# EAGLE board Haar_Primal (EAGLE 9.6.2)
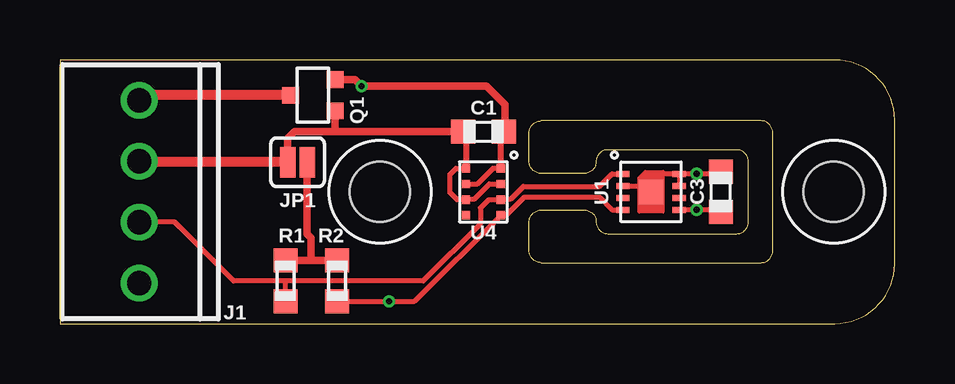
[diagram p0: board, top side]
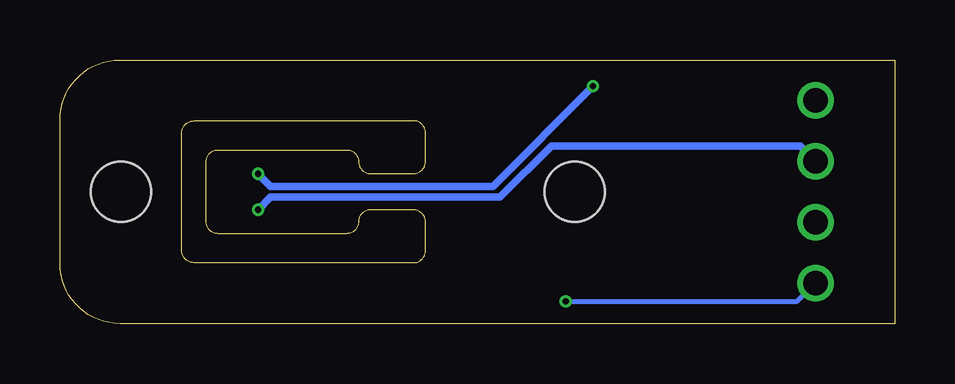
[diagram p1: board, bottom side, seen from below]

Size 34.8 x 11 mm. Coordinates in mm from the lower left corner, seen from the top.
Outline: 0,0 32.3,0 arc90 34.8,2.5 34.8,8.5 arc90 32.3,11 0,11 0,0
Outline: 19.56,6.76 19.56,7.96 arc-90 20.06,8.46 29.22,8.46 arc-90 29.72,7.96 29.72,3.04 arc-90 29.22,2.54 20.06,2.54 arc-90 19.56,3.04 19.56,4.24 arc-90 20.06,4.74 21.86,4.74 arc-90 22.35,4.25 arc90 22.85,3.75 28.2,3.75 arc90 28.7,4.25 28.7,6.75 arc90 28.2,7.25 22.84,7.25 arc90 22.35,6.76 arc-90 21.85,6.26 20.06,6.26 arc-90 19.56,6.76
Copper layers (1*16): Top 0.035559375mm / dielectric 1.6mm / Bottom 0.035559375mm
Design rules "oshpark-2layer": minimum track width 6mil, minimum drill 10mil, track to track 6mil, track to pad 6mil, pad to pad 6mil, via to via 6mil, smd to smd 6mil, copper to edge 15mil, drill to drill 6mil, minimum pad ring 5mil, minimum via ring 5mil, stop-mask expansion 2.5mil, vias tented up to drill 0mil, thermal gap 10mil

## Footprints (pad centres in the part's own frame; a part is rotated, then mirrored left to right if it is on the bottom)
C0603 = smd 1 x 1: 1 -0.85,0; 2 0.85,0
2_56 = hole 2.5: 0,0
1X04_SCREW = drill 1.016: 1 -3.81,0; 2 -1.27,0; 3 1.27,0; 4 3.81,0
SMT-JUMPER_2_NC_PASTE_SILK = smd 0.635 x 1.27: 1 -0.406,0; 2 0.406,0
SOT323 = smd 0.7 x 0.7: 1 -0.65,-0.925; 2 0.65,-0.925; 3 0,0.925
R0603 = smd 1 x 1: 1 -0.85,0; 2 0.85,0
DFN_8_2.5X2.5 = smd 0.55 x 0.25: 1 -1.175,0.75; 2 -1.175,0.25; 3 -1.175,-0.25; 4 -1.175,-0.75; 5 1.175,-0.75; 6 1.175,-0.25; 7 1.175,0.25; 8 1.175,0.75 | smd 1 x 1: EP 0,0
PG-VLGA-8 = smd 0.35 x 0.35: 1 0.725,0.975; 2 0.725,0.325; 3 0.725,-0.325; 4 0.725,-0.975; 5 -0.725,-0.975; 6 -0.725,-0.325; 7 -0.725,0.325; 8 -0.725,0.975

## Placement (x,y rotation side)
C1  0.1uF  [C0603]  17.65,8 0 top
C3  0.1uF  [C0603]  27.56,5.5 90 top
H1  [2_56]  32.26,5.5 0 top
H2  [2_56]  13.34,5.5 0 top
J1  CONN_42.54_SCREW  [1X04_SCREW]  3.3,5.5 90 top
JP1  JUMPER-SMT_2_NC_PASTE_SILK  [SMT-JUMPER_2_NC_PASTE_SILK]  9.91,6.73 180 top
Q1  2N7002  [SOT323]  10.54,9.53 90 top
R1  10k  [R0603]  9.4,1.78 90 top
R2  10k  [R0603]  11.56,1.78 90 top
U1  SHT30DFN  [DFN_8_2.5X2.5]  24.64,5.5 0 top
U4  DPS368  [PG-VLGA-8]  17.65,5.5 0 top

## Library data of the parts
C1 C3 = bschulz_passives; DIGIKEY: 490-6051-1-ND; MF: Murata; MPN: GCM188R71E104KA57D
H1 H2 = bschulz
J1 = bschulz; DIGIKEY: ED10563-ND; MF: On Shore; MPN: OSTVN04A150
JP1 = SparkFun-Jumpers
Q1 = bschulz; DIGIKEY: 2N7002W-FDICT-ND; MF: Diodes Incorporated; MPN: 2N7002W-7-F; PROD_ID: TRANS-11151
R1 R2 = bschulz_passives; DIGIKEY: 311-10.0KHRCT-ND; MF: Yageo; MPN: RC0603FR-0710KL; VALUE_PART: 10k
U1 = bschulz; DIGIKEY: 1649-1065-1-ND; DISP: SHT30; MF: Sensirion; MPN: SHT30-DIS-F2.5KS
U4 = bschulz; DIGIKEY: DPS368XTSA1CT-ND; DISP: DPS368; MF: Infineon; MPN: DPS368XTSA1

## Nets
3V3: C1.1 C3.1 J1.3 JP1.2 Q1.1 U1.5 U4.2 U4.6 U4.8
GND: C1.2 C3.2 Q1.2 U1.2 U1.7 U1.8 U1.EP U4.1 U4.7
I2C_PU: JP1.1 R1.2 R2.2
INT_PRES: U4.5
INT_RH: U1.3
SCL: J1.1 R2.1 U1.4 U4.4
SDA: J1.2 R1.1 U1.1 U4.3
VIN-: J1.4 Q1.3

## Tracks (layer width: path | path; a pad name or v marks a point on that pad's centre or on a via)
3V3  (via drill 0.25)
  Top 0.2: C3.1 27.46,4.75 v26.54,4.75 U1.5 | U4.2 17.9,5.83 17.28,5.21 16.96,5.21 U4.6 16.54,5.17 16.26,5.46 16.26,6.22 16.51,6.48 U4.8
  Top 0.254: C1.1 16.93,7.88 U4.8
  Top 0.305: JP1.2 9.5,7.72 9.78,8 11.43,8 | 11.43,8 C1.1 | Q1.1 11.47,8.04 11.43,8
  Top 0.406: J1.3 9.46,6.77 JP1.2
  Bottom 0.305: J1.3 3.94,7.41 14.31,7.41 16.45,5.27 26.02,5.27 v26.54,4.75
GND  (via drill 0.25)
  Top 0.2: U1.2 24.39,5.75 24.47,5.67 | 24.47,5.67 U1.EP | U1.8 U1.7 | U1.8 25.05,6.25 24.47,5.67 | C3.2 27.46,6.25 v26.54,6.25 U1.8 | U4.7 17.4,5.83 18.05,6.47 U4.1
  Top 0.254: U4.1 18.38,7.88 C1.2
  Top 0.305: Q1.2 12.3,10.18 v12.57,9.91 17.78,9.91 18.54,9.14 18.54,8.04 C1.2
  Bottom 0.305: v12.57,9.91 16.75,5.73 26.02,5.73 v26.54,6.25
I2C_PU
  Top 0.305: R1.2 10.48,2.63 | 10.48,2.63 R2.2 | 10.48,2.63 10.48,3.58 10.31,3.75 JP1.1
SCL  (via drill 0.25)
  Top 0.2: U1.4 23.01,4.75 22.49,5.27 19.36,5.27 18.62,4.53 U4.4 18.38,4.52 14.79,0.93 v13.72,0.93 R2.1
  Bottom 0.2: v13.72,0.93 4.06,0.93 J1.1
SDA
  Top 0.2: U1.1 23.01,6.25 22.49,5.73 19.32,5.73 18.8,5.21 18.41,5.21 U4.3 17.88,5.17 17.53,4.83 17.53,4.16 15.14,1.78 9.4,1.78 | 9.4,1.78 7.24,1.78 4.79,4.23 J1.2 | R1.1 9.4,1.78
  Top 0.254: R1.1 9.11,0.93
VIN-
  Top 0.406: Q1.3 3.52,9.53 J1.4

## Text on the board
Document: #2 Screw
tDocu: Project Haar | GND | 3v3 | SDA | SCL | Primal
bDocu: To Logger | Project Haar - Primal / v0.0 / Bobby Schulz / UMN/GEMS